# Altium PCB MachXO3D-QFN72-breakout.PcbDoc
Units mm, origin at the board's own origin, x right, y up, seen from the top; angles counter-clockwise.
Board outline 38 x 32 mm, 4 copper layers (Top Layer, L2, L3, Bottom Layer), stack 1.588 mm thick; 90 components, 61 nets, 201 pads, 144 vias.
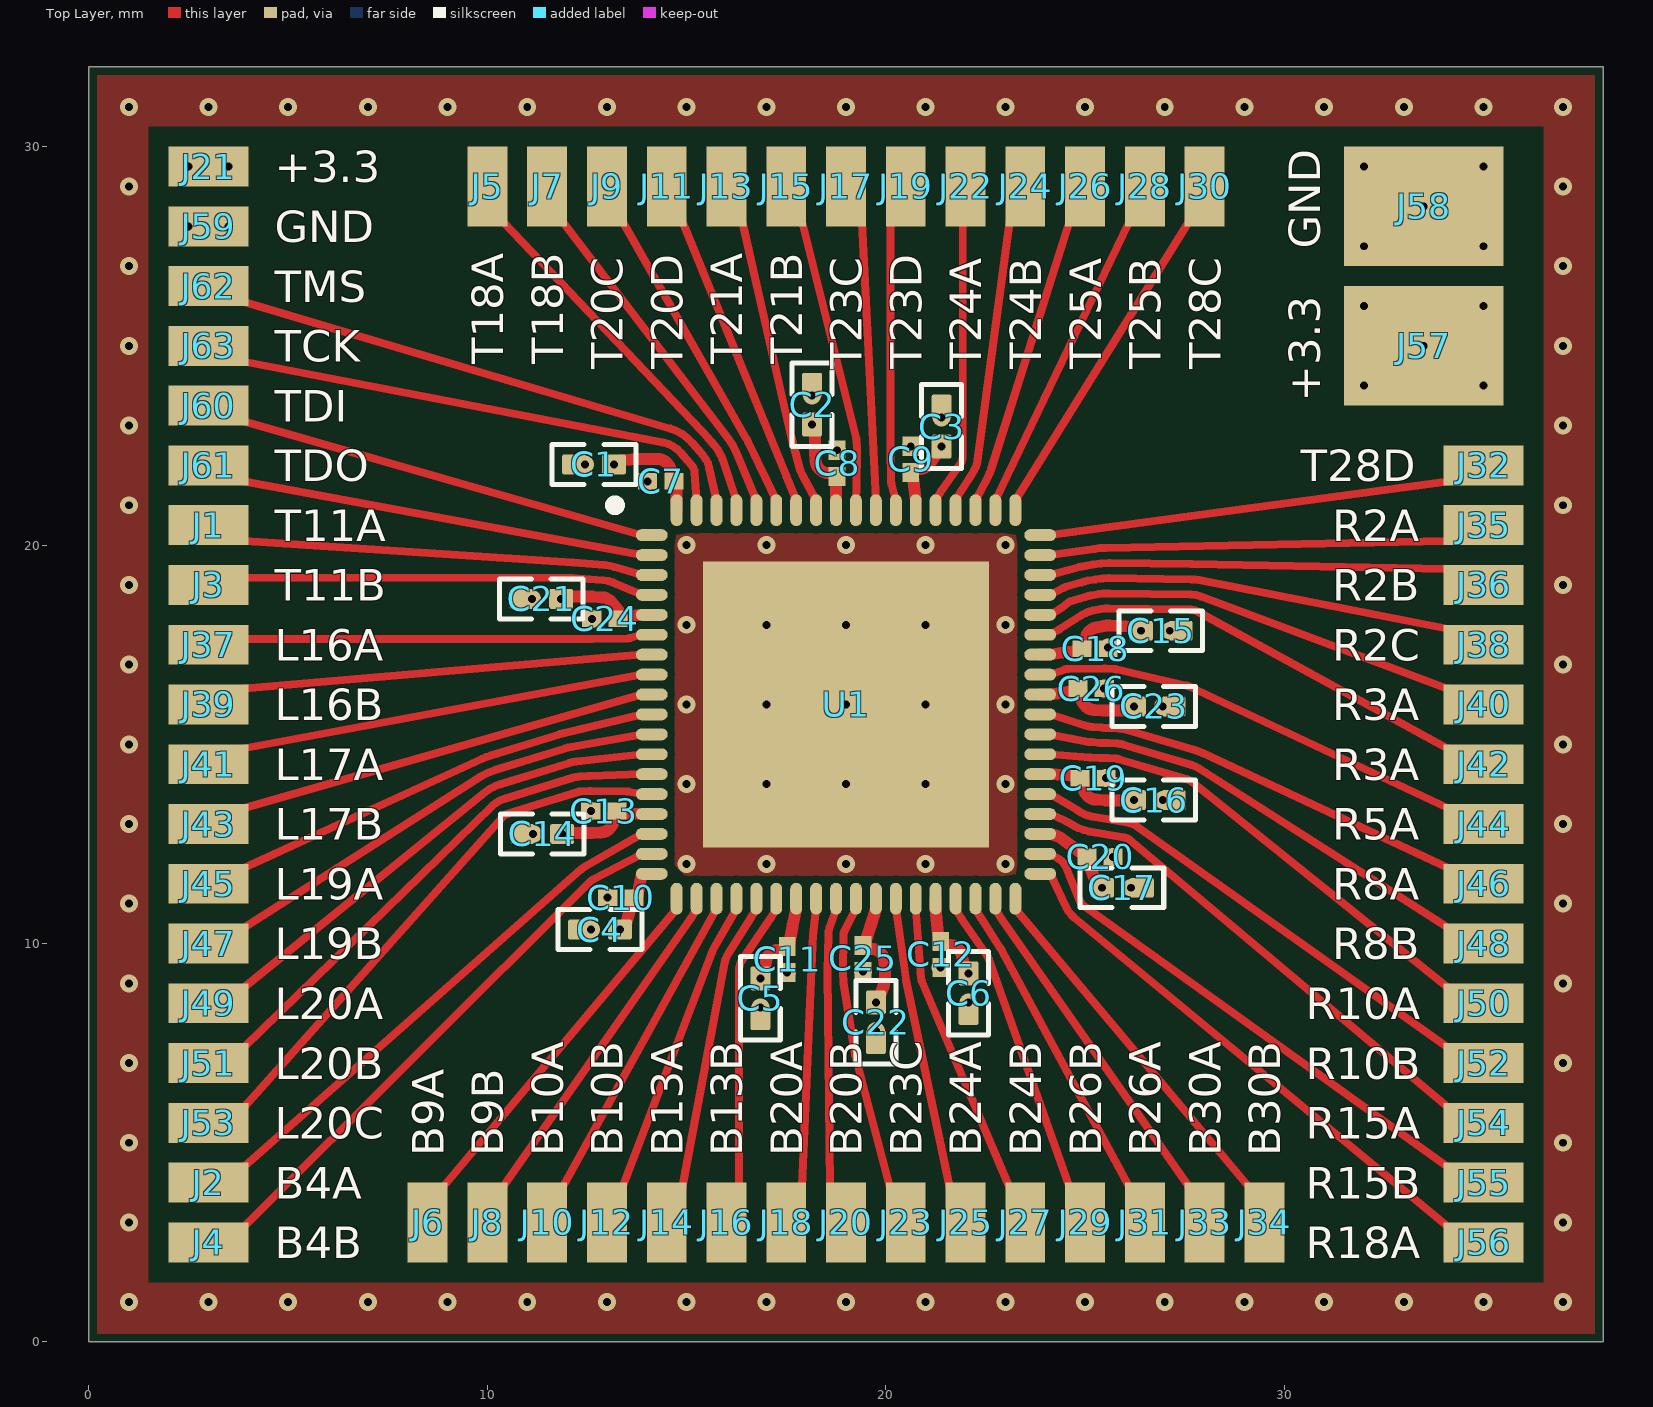
[diagram p0: Top Layer view]
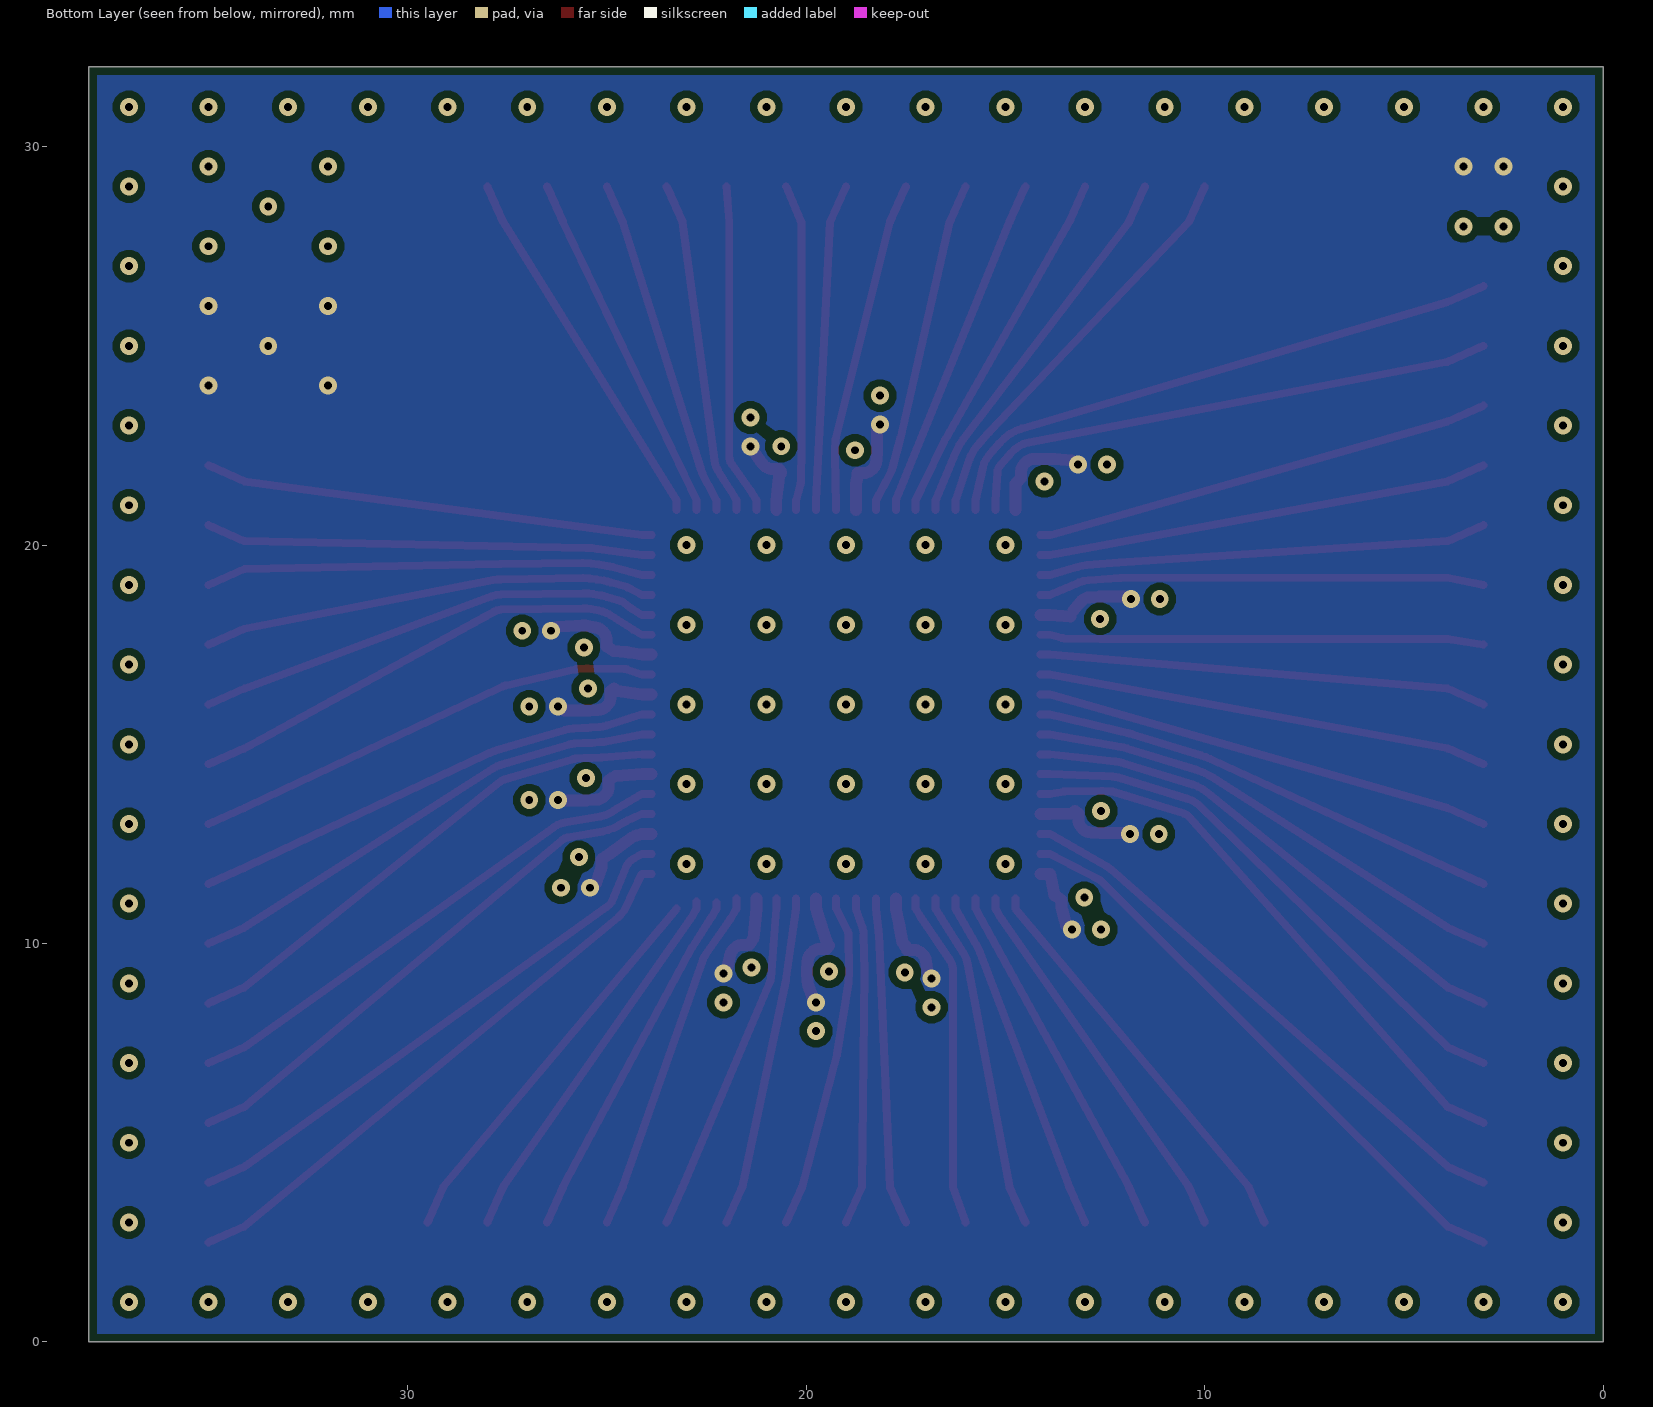
[diagram p1: Bottom Layer view, seen from below]
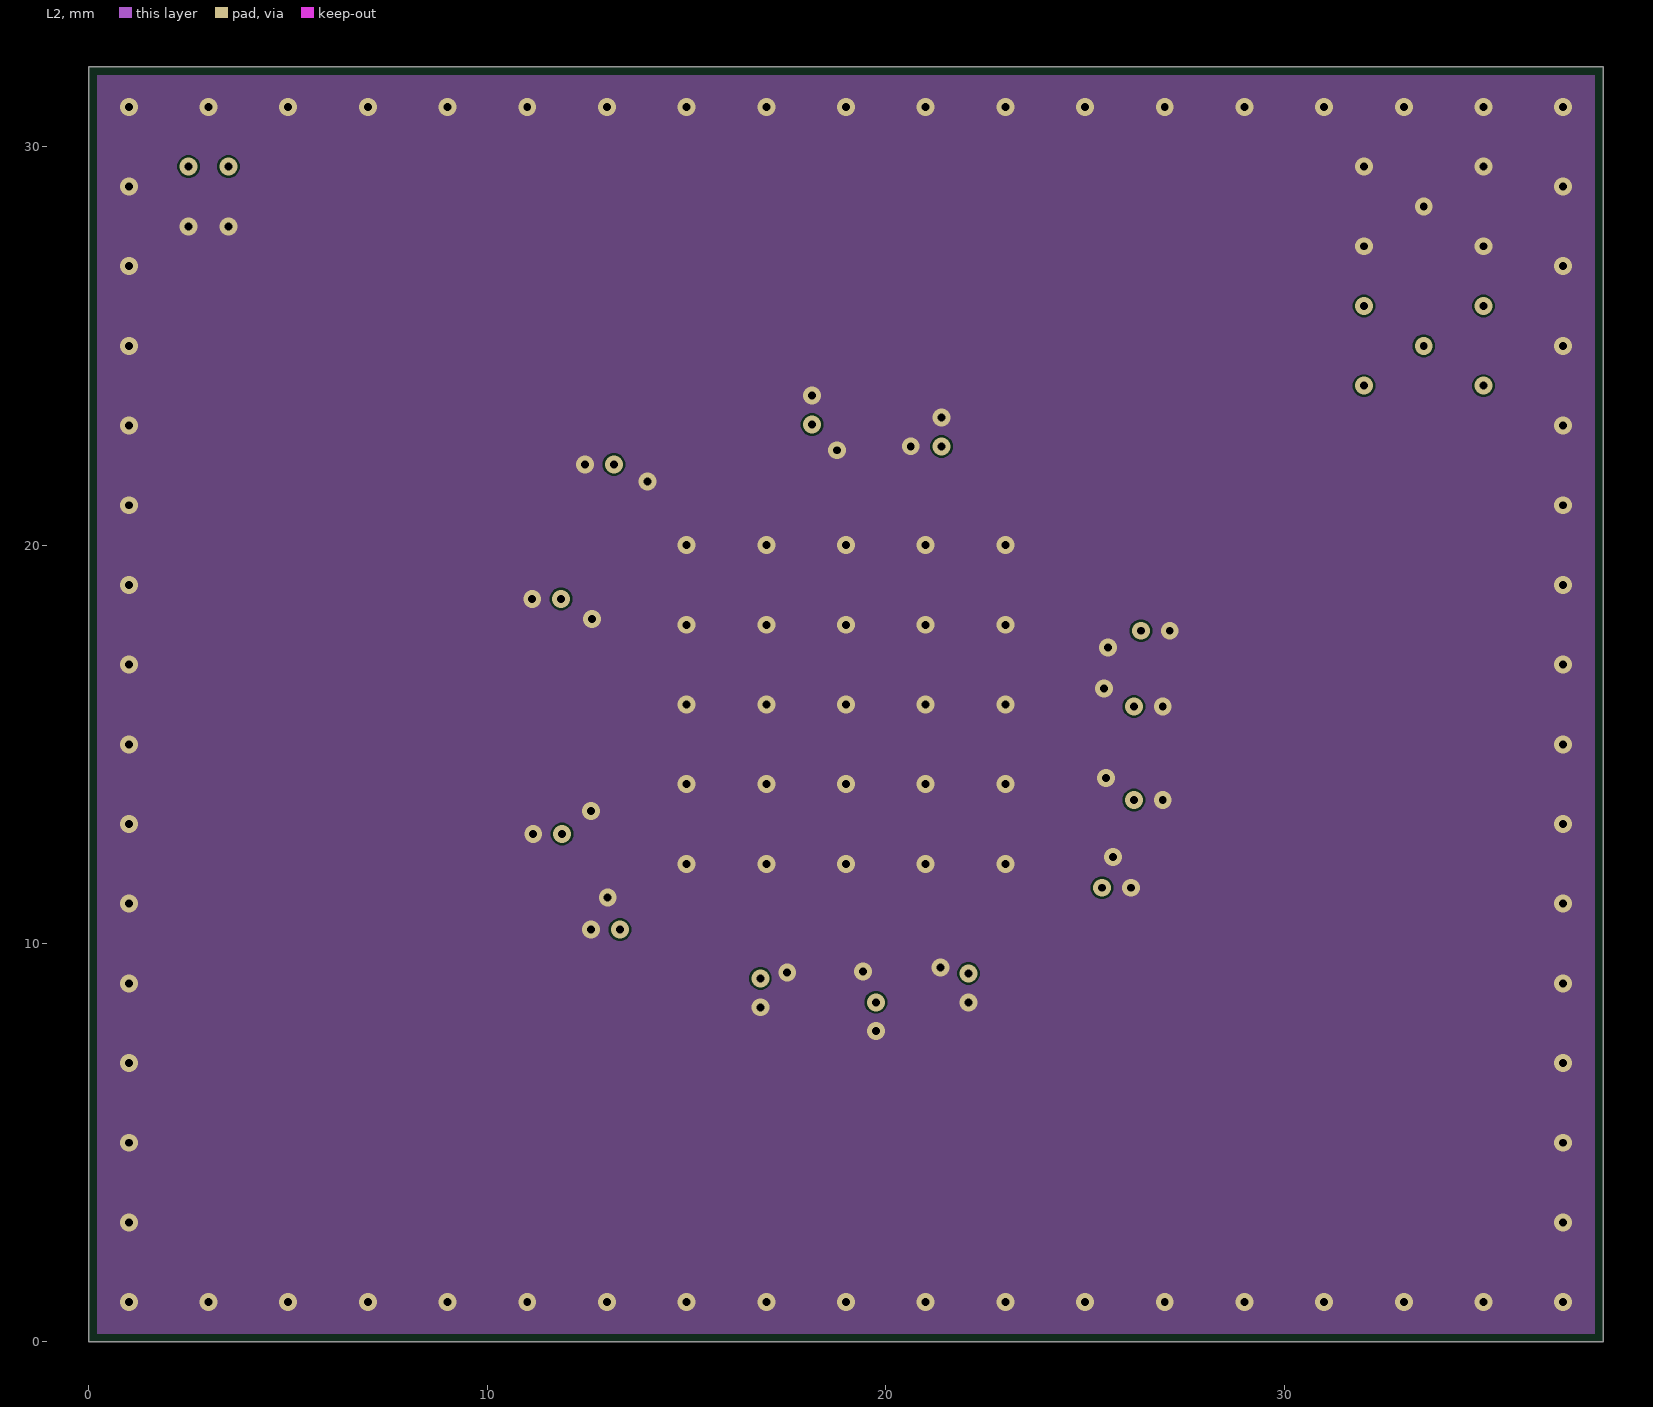
[diagram p2: L2]
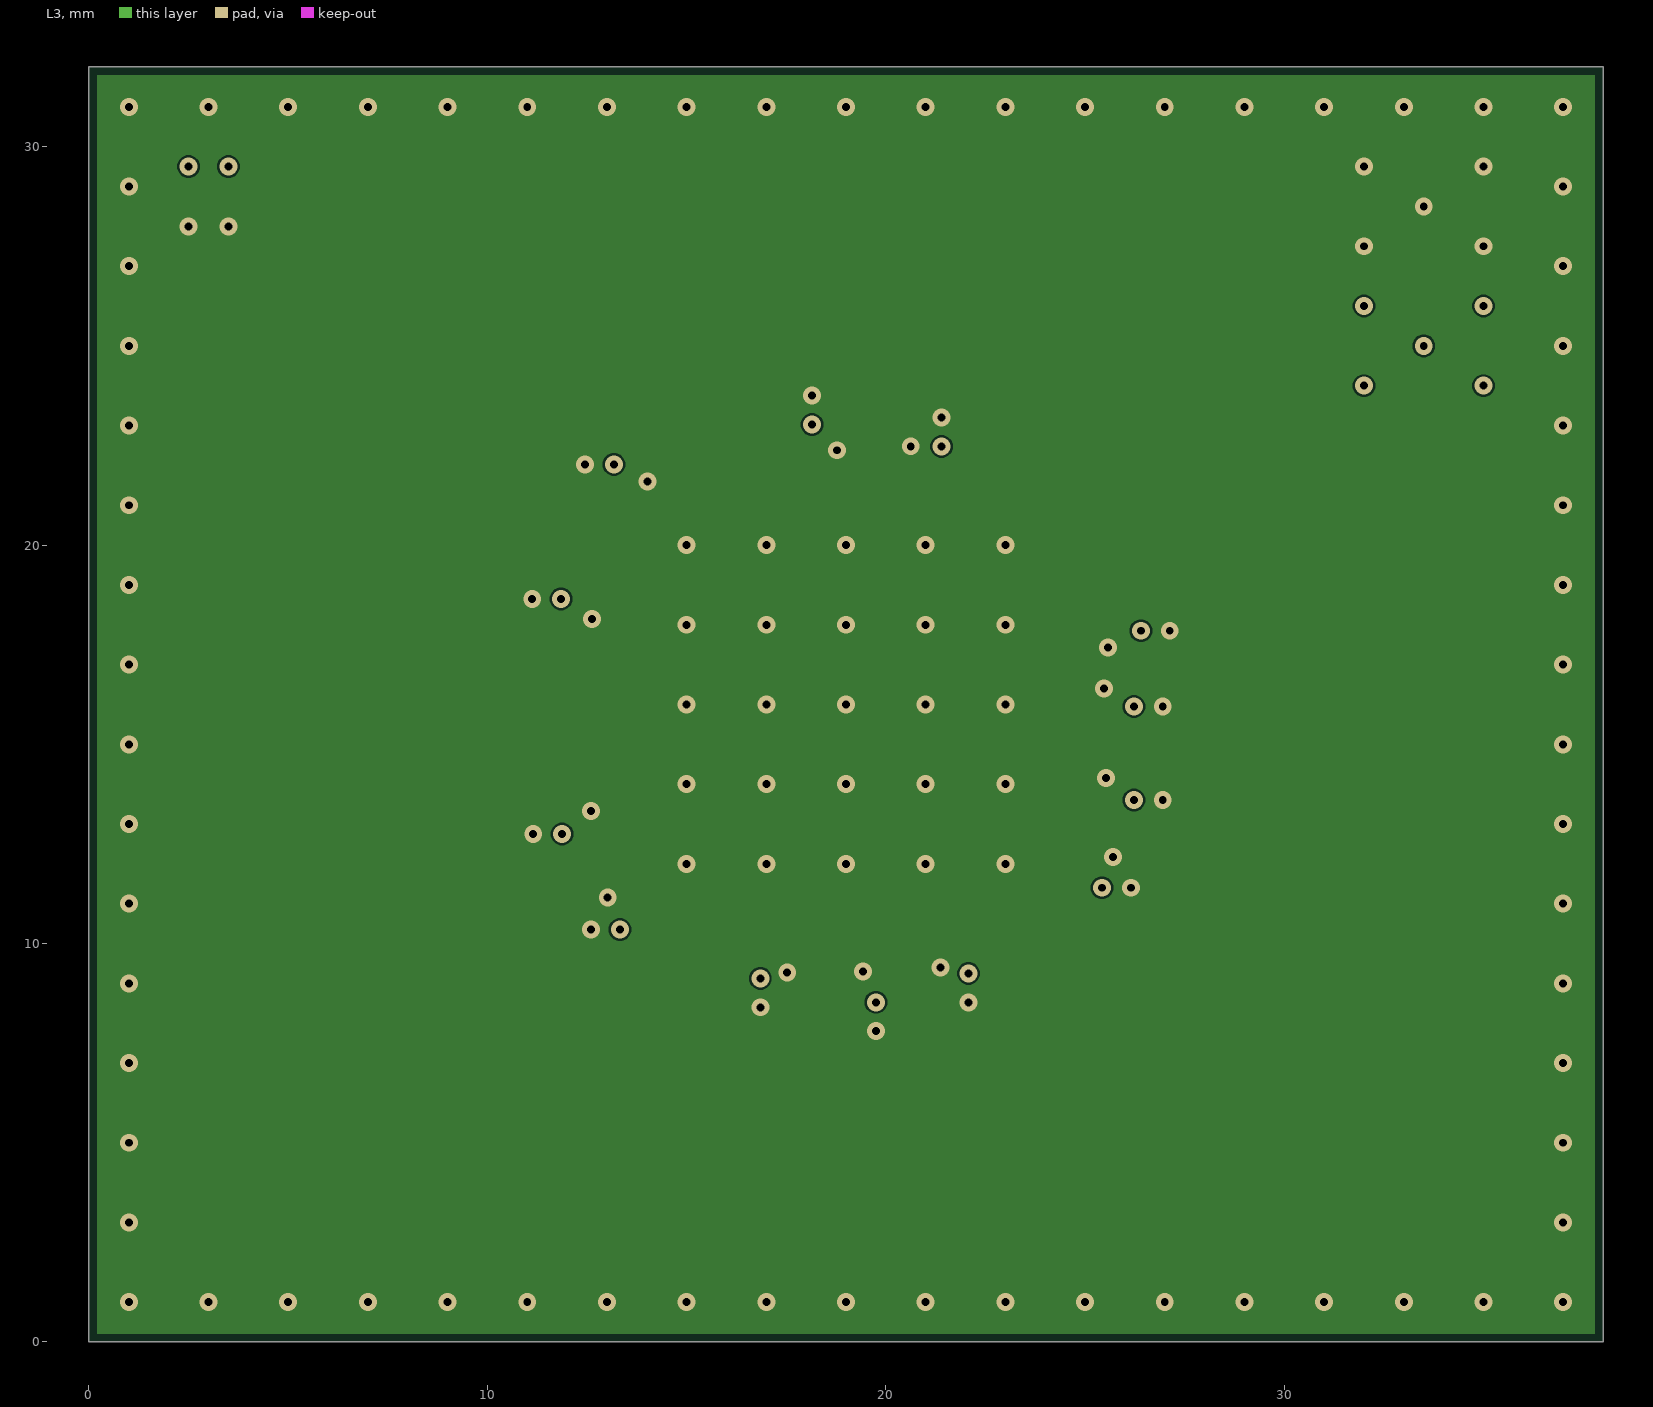
[diagram p3: L3]
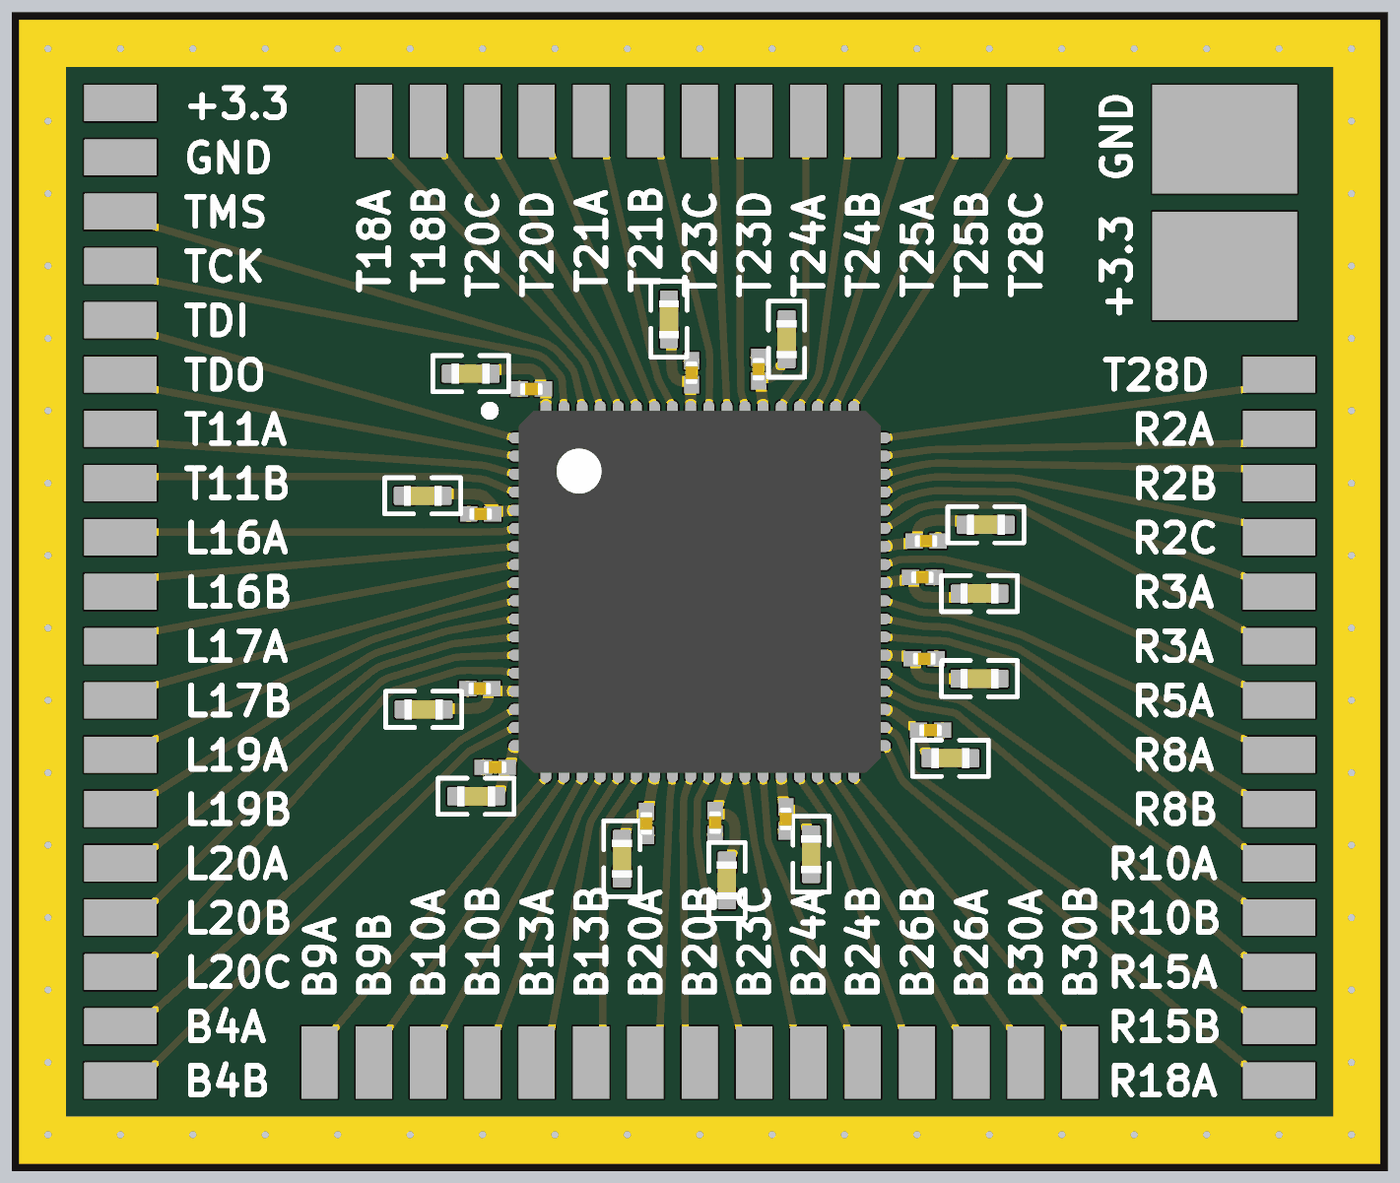
[diagram p4: 3D render of the assembled board from above, using the file's embedded part models]

## Layer stack, top to bottom
Top Solder: solder mask 0.0102, Solder Resist, Dk 3.5
Top Layer: signal copper 0.035
Dielectric 2: prepreg 0.2083, PP-022, Dk 4.5
L2: signal copper 0.018
Dielectric 1: core 1.065, Core-042, Dk 4.6
L3: signal copper 0.018
Dielectric 3: prepreg 0.2083, PP-022, Dk 4.5
Bottom Layer: signal copper 0.035
Bottom Solder: solder mask 0.0102, Solder Resist, Dk 3.5

## Board outline
0,0 38,0 38,32 0,32

## Design rules (kind name [scope] priority, off if disabled: settings)
BoardOutlineClearance [All] p1: gap=0.2 ignorepadtopadclearanceinfootprint=FALSE except(0: Arc-SplitContinuation Track-SplitContinuation SMDPad-SplitContinuation THPad-SplitContinuation Via-SplitContinuation Fill-SplitContinuation Poly-SplitContinuation Region-SplitContinuation Text-SplitContinuation)
Clearance [All] p1: gap=0.18 ignorepadtopadclearanceinfootprint=TRUE except(0: Arc-Hole Track-Hole SMDPad-Hole THPad-Hole Via-Hole Fill-Hole Poly-Hole Region-Hole Text-Hole)
ComponentClearance [All] p1: gap=0.2 collisioncheckmode=3 verticalgap=0.2 showdistances=FALSE
HoleSize [All] p1: absolutevalues=TRUE maxlimit=3 minlimit=0.2 maxpercent=80.000 minpercent=20.000
HoleToHoleClearance [All] p1: gap=0.2 allowstackedmicrovias=TRUE
MinimumSolderMaskSliver [All] p1: minsoldermaskwidth=0.2
PlaneClearance [All] p1: clearance=0.5
PolygonConnect PolygonConnectVia [IsVia] p1: connectstyle=Direct reliefconductorwidth=0.2 reliefentries=4 polygonreliefangle="90 Angle" airgapwidth=0.2
PolygonConnect [All] p2: connectstyle=Direct reliefconductorwidth=0.2 reliefentries=4 polygonreliefangle="90 Angle" airgapwidth=0.2
RoomDefinition MachXO3D-QFN72-breakout [InComponentClass('MachXO3D-QFN72-breakout')] p1: confinementstyle=ConfineIn formatcopy=TRUE lockcomponents=FALSE outline -50,-39 101,-39 101,110 -50,110
RoutingVias [All] p1: holewidth=0.2 width=0.45 viastyle="Through Hole" minholewidth=0.2 minwidth=0.45 maxholewidth=3 maxwidth=5
SilkToSilkClearance [All] p1: silktosilkclearance=0.2
SilkToSolderMaskClearance [IsPad] p1: minsilkscreentomaskgap=0.2 clearancetoexposedcopper=TRUE
SolderMaskExpansion SolderMaskExpansionVia [IsVia] p1: expansion=0.05 istentingtop=TRUE
SolderMaskExpansion [All] p2: expansion=0.05 istentingtop=FALSE
Width [All] p1: maxlimit=5 minlimit=0.2 preferedwidth=0.2
23 further rules are at their usual default settings.

## Components (designator, comment, footprint, x,y, rotation, side; value= is the part's Value field where it differs from the comment)
C1 "10u" CAPC1005X55N 12.675,22.025 r180 top
C2 "10u" CAPC1005X55N 18.15,23.525 r90 top
C3 "10u" CAPC1005X55N 21.4,22.975 r90 top
C4 "10u" CAPC1005X55N 12.825,10.35 r180 top
C5 "10u" CAPC1005X55N 16.85,8.625 r270 top
C6 "10u" CAPC1005X55N 22.075,8.75 r270 top
C7 "CAPC_100n_0201" CAPC0603X04N 14.35,21.6 r0 top value=100n
C8 "CAPC_100n_0201" CAPC0603X04N 18.775,22.05 r270 top value=100n
C9 "CAPC_100n_0201" CAPC0603X04N 20.625,22.15 r270 top value=100n
C10 "CAPC_100n_0201" CAPC0603X04N 13.35,11.15 r0 top value=100n
C11 "CAPC_100n_0201" CAPC0603X04N 17.525,9.6 r90 top value=100n
C12 "CAPC_100n_0201" CAPC0603X04N 21.375,9.725 r90 top value=100n
C13 "CAPC_100n_0201" CAPC0603X04N 12.925,13.325 r0 top value=100n
C14 "10u" CAPC1005X55N 11.375,12.75 r180 top
C15 "10u" CAPC1005X55N 26.9,17.85 r0 top
C16 "10u" CAPC1005X55N 26.725,13.6 r0 top
C17 "10u" CAPC1005X55N 25.925,11.4 r0 top
C18 "CAPC_100n_0201" CAPC0603X04N 25.25,17.4 r180 top value=100n
C19 "CAPC_100n_0201" CAPC0603X04N 25.2,14.15 r180 top value=100n
C20 "CAPC_100n_0201" CAPC0603X04N 25.375,12.175 r180 top value=100n
C21 "10u" CAPC1005X55N 11.35,18.65 r180 top
C22 "10u" CAPC1005X55N 19.75,8.025 r270 top
C23 "10u" CAPC1005X55N 26.725,15.95 r0 top
C24 "CAPC_100n_0201" CAPC0603X04N 12.95,18.15 r0 top value=100n
C25 "CAPC_100n_0201" CAPC0603X04N 19.425,9.625 r90 top value=100n
C26 "CAPC_100n_0201" CAPC0603X04N 25.15,16.4 r180 top value=100n
J1 "T11A" PAD-1020 3,20.5 r90 top
J2 "B4A" PAD-1020 3,4 r90 top
J3 "T11B" PAD-1020 3,19 r90 top
J4 "B4B" PAD-1020 3,2.5 r90 top
J5 "T18A" PAD-1020 10,29 r0 top
J6 "B9A" PAD-1020 8.5,3 r0 top
J7 "T18B" PAD-1020 11.5,29 r0 top
J8 "B9B" PAD-1020 10,3 r0 top
J9 "T20C" PAD-1020 13,29 r0 top
J10 "B10A" PAD-1020 11.5,3 r0 top
J11 "T20D" PAD-1020 14.5,29 r0 top
J12 "B10B" PAD-1020 13,3 r0 top
J13 "T21A" PAD-1020 16,29 r0 top
J14 "B13A" PAD-1020 14.5,3 r0 top
J15 "T21B" PAD-1020 17.5,29 r0 top
J16 "B13B" PAD-1020 16,3 r0 top
J17 "T23C" PAD-1020 19,29 r0 top
J18 "B20A" PAD-1020 17.5,3 r0 top
J19 "T23D" PAD-1020 20.5,29 r0 top
J20 "B20B" PAD-1020 19,3 r0 top
J21 "+3.3" PAD-1020 3,29.5 r270 top
J22 "T24A" PAD-1020 22,29 r0 top
J23 "B23C" PAD-1020 20.5,3 r0 top
J24 "T24B" PAD-1020 23.5,29 r0 top
J25 "B24A" PAD-1020 22,3 r0 top
J26 "T25A" PAD-1020 25,29 r180 top
J27 "B24B" PAD-1020 23.5,3 r0 top
J28 "T25B" PAD-1020 26.5,29 r180 top
J29 "B26A" PAD-1020 25,3 r0 top
J30 "T28C" PAD-1020 28,29 r0 top
J31 "B26B" PAD-1020 26.5,3 r0 top
J32 "T28D" PAD-1020 35,22 r270 top
J33 "B30A" PAD-1020 28,3 r0 top
J34 "B30B" PAD-1020 29.5,3 r0 top
J35 "R2A" PAD-1020 35,20.5 r90 top
J36 "R2B" PAD-1020 35,19 r90 top
J37 "L16A" PAD-1020 3,17.5 r90 top
J38 "R2C" PAD-1020 35,17.5 r90 top
J39 "L16B" PAD-1020 3,16 r90 top
J40 "R3A" PAD-1020 35,16 r90 top
J41 "L17A" PAD-1020 3,14.5 r90 top
J42 "R3A" PAD-1020 35,14.5 r90 top
J43 "L17B" PAD-1020 3,13 r90 top
J44 "R5A" PAD-1020 35,13 r90 top
J45 "L19A" PAD-1020 3,11.5 r90 top
J46 "R8A" PAD-1020 35,11.5 r90 top
J47 "L19B" PAD-1020 3,10 r90 top
J48 "R8B" PAD-1020 35,10 r90 top
J49 "L20A" PAD-1020 3,8.5 r90 top
J50 "R10A" PAD-1020 35,8.5 r90 top
J51 "L20B" PAD-1020 3,7 r90 top
J52 "R10B" PAD-1020 35,7 r90 top
J53 "L20C" PAD-1020 3,5.5 r90 top
J54 "R15A" PAD-1020 35,5.5 r90 top
J55 "R15B" PAD-1020 35,4 r90 top
J56 "R18A" PAD-1020 35,2.5 r90 top
J57 "+3.3" POWER-PAD-4x3 33.5,25 r0 top
J58 "GND" POWER-PAD-4x3 33.5,28.5 r0 top
J59 "GND" PAD-1020 3,28 r90 top
J60 "TDI" PAD-1020 3,23.5 r90 top
J61 "TDO" PAD-1020 3,22 r90 top
J62 "TMS" PAD-1020 3,26.5 r90 top
J63 "TCK" PAD-1020 3,25 r90 top
U1 "LCMXO3D-QFN72" MachXO3D-QFN72 19,16 r0 top locked

## Footprints (in the part's own frame and the unit in brackets; to place one, negate y for a bottom-side part, rotate by r counter-clockwise, add the part's x,y. Pads: shape width x height; smd on the part's side, far side on the other; paste and mask are expansions set on the pad)
CAPC0603X04N [mm] "Chip Capacitor, 2-Leads, Body 0,60x0,30mm, IPC Medium Density"
  rect 0.48x0.42 smd: 1(-0.33,0) 2(0.33,0)
  body extent -0.33,-0.18 0.33,0.18, height 0.35
CAPC1005X55N [mm] "Chip Capacitor, Body 1.0x0.5mm, EIA 0402, IPC Medium Density"
  round 0.2 on Mech15: 0(0,0)
  rrect20% 0.6x0.5 smd: 1(-0.5,0) 2(0.5,0)
  Top Layer pour cut-out: -0.325,0.375 -0.2,0.5 0.2,0.5 0.325,0.375 0.325,-0.375 0.2,-0.5 -0.2,-0.5 -0.325,-0.375
  silkscreen extent -1.05,-0.5 1.05,0.5, body extent -0.52,-0.27 0.53,0.28, height 0.55
MachXO3D-QFN72 [mm] "QFN, 72-Leads, Body 10,00x10,00mm, Pitch 0,50mm, Thermal Pad 7,18x7,18mm, IPC Medium Density"
  oval 0.8x0.3 smd: 1(-4.875,4.25) 2(-4.875,3.75) 3(-4.875,3.25) 4(-4.875,2.75) 5(-4.875,2.25) 6(-4.875,1.75) 7(-4.875,1.25) 8(-4.875,0.75) 9(-4.875,0.25) 10(-4.875,-0.25) 11(-4.875,-0.75) 12(-4.875,-1.25) 13(-4.875,-1.75) 14(-4.875,-2.25) 15(-4.875,-2.75) 16(-4.875,-3.25) 17(-4.875,-3.75) 18(-4.875,-4.25) 37(4.875,-4.25) 38(4.875,-3.75) 39(4.875,-3.25) 40(4.875,-2.75) 41(4.875,-2.25) 42(4.875,-1.75) 43(4.875,-1.25) 44(4.875,-0.75) 45(4.875,-0.25) 46(4.875,0.25) 47(4.875,0.75) 48(4.875,1.25) 49(4.875,1.75) 50(4.875,2.25) 51(4.875,2.75) 52(4.875,3.25) 53(4.875,3.75) 54(4.875,4.25)
  oval 0.3x0.8 smd: 19(-4.25,-4.875) 20(-3.75,-4.875) 21(-3.25,-4.875) 22(-2.75,-4.875) 23(-2.25,-4.875) 24(-1.75,-4.875) 25(-1.25,-4.875) 26(-0.75,-4.875) 27(-0.25,-4.875) 28(0.25,-4.875) 29(0.75,-4.875) 30(1.25,-4.875) 31(1.75,-4.875) 32(2.25,-4.875) 33(2.75,-4.875) 34(3.25,-4.875) 35(3.75,-4.875) 36(4.25,-4.875) 55(4.25,4.875) 56(3.75,4.875) 57(3.25,4.875) 58(2.75,4.875) 59(2.25,4.875) 60(1.75,4.875) 61(1.25,4.875) 62(0.75,4.875) 63(0.25,4.875) 64(-0.25,4.875) 65(-0.75,4.875) 66(-1.25,4.875) 67(-1.75,4.875) 68(-2.25,4.875) 69(-2.75,4.875) 70(-3.25,4.875) 71(-3.75,4.875) 72(-4.25,4.875)
  rect 7.18x7.18 smd: 73(0,0)
  silkscreen extent -5.92,4.88 -5.67,5.12, body extent -5,-5 5,5, height 0.9
PAD-1020 [mm]
  rect 1x2 smd: 1(0,0)
POWER-PAD-4x3 [mm]
  rect 4x3 smd: 1(0,0)

## Part data
C1 C2 C3 C4 C5 C6 C14 C15 C16 C17 C21 C22 C23: library part CAPC_1u_0402_X5R_6V3_10%, "Capacitor SMD Cer 1uF 10% 16V X5R 0402", Manufacturer 1="AVX Corporation", Manufacturer 2=Yageo, Manufacturer 3="Samsung Electro-Mechanics America, Inc", Manufacturer 4="TDK Corporation", Manufacturer 5="Murata Electronics North America", Manufacturer Part Number 1=04026D105KAT2A, Manufacturer Part Number 2=CC0402KRX5R5BB105, Manufacturer Part Number 3=CL05A105KQ5NNNC, Manufacturer Part Number 4=C1005X5R0J105K050BB, Manufacturer Part Number 5=GRM155R60J105KE19D, Operating Temperature="-55°C ~ 125°C", Package / Case="0402 (1005 Metric)", Ratings="6.3V; X5R", Supplier Part Number 1=478-2583-1-ND, Tolerance=±10%, ComponentLink1Description=http://www.avx.com/docs/Catalogs/cx5r.pdf, ComponentLink1URL=http://www.avx.com/docs/Catalogs/cx5r.pdf, ComponentLink2Description=http://www.yageo.com/documents/recent/UPY-GPHC_X5R_4V-to-50V_12.pdf, ComponentLink2URL=http://www.yageo.com/documents/recent/UPY-GPHC_X5R_4V-to-50V_12.pdf, ComponentLink3Description=http://www.samsungsem.com/servlet/FileDownload?path=productsearch&sname=CL05A105KQ5NNNC.pdf&oname=CL05A105KQ5NNNC.pdf, ComponentLink3URL=http://www.samsungsem.com/servlet/FileDownload?path=productsearch&sname=CL05A105KQ5NNNC.pdf&oname=CL05A105KQ5NNNC.pdf, ComponentLink4Description=http://product.tdk.com/capacitor/mlcc/en/documents/mlcc_commercial_general_en.pdf, ComponentLink4URL=http://product.tdk.com/capacitor/mlcc/en/documents/mlcc_commercial_general_en.pdf, ComponentLink5Description=http://www.murata.com/products/catalog/pdf/c02e.pdf, ComponentLink5URL=http://www.murata.com/products/catalog/pdf/c02e.pdf, RoHS 1="RoHS Compliant", RoHS 2="RoHS Compliant", RoHS 3="RoHS Compliant", RoHS 4="RoHS Compliant", RoHS 5="RoHS Compliant", SCDType=spec, Size / Dimension="0.039\" L x 0.020\" W (1.00mm x 0.50mm)", Supplier 1=Digi-Key, Supplier 2=Digi-Key, Supplier 3=Digi-Key, Supplier 4=Digi-Key, Supplier 5=Digi-Key, Supplier Part Number 2=311-1438-1-ND, Supplier Part Number 3=1276-1010-1-ND, Supplier Part Number 4=445-4998-1-ND, Supplier Part Number 5=490-1320-1-ND
J1 J2 J3 J4 J5 J6 J7 J8 J9 J10 J11 J12 J13 J14 J15 J16 J17 J18 J19 J20 J21 J22 J23 J24 J25 J26 J27 J28 J29 J30 J31 J32 J33 J34 J35 J36 J37 J38 J39 J40 J41 J42 J43 J44 J45 J46 J47 J48 J49 J50 J51 J52 J53 J54 J55 J56 J59 J60 J61 J62 J63: library part SOLDER-PAD
J57 J58: library part HEADER-1

## Via types
v1: diameter 0.45, hole 0.2, Top Layer to Bottom Layer, tented both sides, 144 vias

## Nets (pads, with @x,y where several pads share a name; then routed paths per layer and width w, separated by ;. In a path a pad name is that pad's centre, name@x,y a point inside that pad or via, vN(x,y) a via of type N, cw(c..) or ccw(c..) an arc to the next point about the centre after c; other vN are vias at no path point)
+3.3: C1.1 C2.1 C3.1 C4.1 C5.1 C6.1 C7.2 C8.2 C9.2 C10.2 C11.2 C12.2 C13.2 C14.1 C15.1 C16.1 C17.1 C18.2 C19.2 C20.2 C21.1 C22.1 C23.1 C24.2 C25.2 C26.2 J21.1 J57.1 U1.5 U1.15 U1.18 U1.25 U1.29 U1.32 U1.39 U1.42 U1.46 U1.48 U1.60 U1.64 U1.72 | length 32.3
  Top Layer w0.3: v1(11.85,18.65) 12,18.705 12.62,18.705 cw(c12.62,18.15) 12.656,18.704 12.881,18.689 cw(c12.86,18.36) 13.114,18.571 C24.2@13.291,18.358 ; v1(11.875,12.75) 12.025,12.77 12.595,12.77 ccw(c12.595,13.325) 12.63,12.771 12.856,12.786 ccw(c12.835,13.115) 13.165,13.115 13.165,13.265 C13.2 13.345,13.265 13.875,13.25 U1.15 ; v1(13.175,22.025) 13.325,22.125 13.752,22.159 cw(c13.78,21.81) 13.78,22.16 14.26,22.16 cw(c14.26,21.81) 14.61,21.81 C7.2@14.61,21.681 ; v1(13.325,10.35) 13.475,10.45 13.58,10.858 ccw(c13.26,10.94) 13.59,10.94 13.59,11.09 C10.2 13.77,11.21 13.875,11.75 U1.18 ; C24.2@13.37,18.21 13.875,18.25 U1.5 ; C7.2 14.75,21.54 U1.72 ; v1(16.85,9.125) 16.95,9.275 16.988,9.554 cw(c17.315,9.51) 17.315,9.84 17.465,9.84 C11.2 ; C11.2@17.506,9.952 17.585,10.02 17.655,10.427 cw(c18.67,10.252) 17.663,10.467 17.75,10.875 U1.25 ; v1(18.15,23.025) 18.22,22.875 18.22,22.38 ccw(c18.775,22.38) 18.221,22.345 18.236,22.119 ccw(c18.565,22.14) 18.565,21.81 18.715,21.81 C8.2@18.726,21.63 ; C8.2@18.727,21.629 cw(c18.447,21.521) 18.747,21.524 18.75,21.125 U1.64 ; C25.2 19.485,9.865 19.635,9.865 cw(c19.635,9.535) 19.964,9.556 19.979,9.331 cw(c19.425,9.295) 19.979,9.258 19.964,9.034 cw(c19.635,9.055) 19.946,8.944 19.85,8.675 v1(19.75,8.525) ; C25.2@19.485,10.045 19.491,10.062 ccw(c19.208,10.163) 19.494,10.07 19.707,10.727 ccw(c19.25,10.875) 19.711,10.741 19.75,10.875 U1.29 ; U1.60 20.75,21.125 20.697,21.597 cw(c20.995,21.631) 20.696,21.603 20.685,21.73 C9.2 20.685,21.91 20.835,21.91 ccw(c20.835,22.24) 21.104,22.049 21.3,22.325 v1(21.4,22.475) ; U1.32 21.25,10.875 21.306,10.238 21.315,10.145 C12.2 21.435,9.965 21.585,9.965 cw(c21.585,9.635) 21.907,9.706 21.975,9.4 v1(22.075,9.25) ; U1.39 24.125,12.75 24.259,12.711 cw(c24.125,12.25) 24.41,12.637 24.955,12.235 C20.2 25.135,12.115 25.135,11.965 ccw(c25.465,11.965) 25.153,11.859 25.275,11.5 v1(25.425,11.4) ; U1.42 24.125,14.25 24.78,14.21 C19.2 24.96,14.09 24.96,13.94 ccw(c25.29,13.94) 25.268,13.611 25.494,13.596 ccw(c25.53,14.15) 25.53,13.595 26.075,13.595 v1(26.225,13.6) ; U1.46 24.125,16.25 24.73,16.34 C26.2 24.91,16.34 24.91,16.19 ccw(c25.24,16.19) 25.219,15.861 25.444,15.846 ccw(c25.48,16.4) 25.484,15.845 26.075,15.85 v1(26.225,15.95) ; U1.48 24.125,17.25 24.455,17.309 cw(c24.58,16.61) 24.529,17.318 24.83,17.34 C18.2 25.01,17.46 25.01,17.61 cw(c25.34,17.61) 25.281,17.935 25.481,17.971 cw(c25.58,17.425) 25.607,17.979 26.25,17.95 v1(26.4,17.85)
  other v1: 32,24 35,24 33.5,25 32,26 35,26 2.5,29.5 3.5,29.5
GND: C1.2 C2.2 C3.2 C4.2 C5.2 C6.2 C7.1 C8.1 C9.1 C10.1 C11.1 C12.1 C13.1 C14.2 C15.2 C16.2 C17.2 C18.1 C19.1 C20.1 C21.2 C22.2 C23.2 C24.1 C25.1 C26.1 J58.1 J59.1 U1.73
  other v1: 1,1 3,1 5,1 7,1 9,1 11,1 13,1 15,1 17,1 19,1 21,1 23,1 25,1 27,1 29,1 31,1 33,1 35,1 37,1 1,3 37,3 1,5 37,5 1,7 37,7 19.75,7.8 16.85,8.4 22.075,8.525 1,9 37,9 17.525,9.27 19.425,9.295 21.375,9.395 12.6,10.35 1,11 37,11 13.02,11.15 26.15,11.4 15,12 17,12 19,12 21,12 23,12 25.705,12.175 11.15,12.75 1,13 37,13 12.595,13.325 26.95,13.598 15,14 17,14 19,14 21,14 23,14 25.53,14.15 1,15 37,15 26.95,15.95 15,16 17,16 19,16 21,16 23,16 25.48,16.4 1,17 37,17 25.58,17.425 27.125,17.85 15,18 17,18 19,18 21,18 23,18 12.62,18.15 11.125,18.65 1,19 37,19 15,20 17,20 19,20 21,20 23,20 1,21 37,21 14.02,21.6 12.45,22.025 18.775,22.38 20.625,22.48 1,23 37,23 21.4,23.2 18.15,23.75 1,25 37,25 1,27 37,27 32,27.5 35,27.5 2.5,28 3.5,28 33.5,28.5 1,29 37,29 32,29.5 35,29.5 1,31 3,31 5,31 7,31 9,31 11,31 13,31 15,31 17,31 19,31 21,31 23,31 25,31 27,31 29,31 31,31 33,31 35,31 37,31
PB4A: J2.1 U1.16 | length 14.3
  Top Layer w0.2: J2.1 3.9,4.4 12.343,11.855 cw(c12.78,11.36) 12.451,11.932 13.875,12.75 U1.16
PB4B: J4.1 U1.17 | length 15
  Top Layer w0.2: J4.1 3.9,2.9 12.582,11.558 cw(c12.78,11.36) 12.653,11.609 13.875,12.25 U1.17
PB9A: J6.1 U1.19 | length 10.3
  Top Layer w0.2: J6.1 8.9,3.9 14.75,10.875 U1.19
PB9B: J8.1 U1.20 | length 9.7
  Top Layer w0.2: J8.1 10.4,3.9 15.102,10.629 ccw(c14.75,10.875) 15.12,10.656 15.25,10.875 U1.20
PB10A: J10.1 U1.21 | length 9.2
  Top Layer w0.2: J10.1 11.9,3.9 15.75,10.875 U1.21
PB10B: J12.1 U1.22 | length 8.8
  Top Layer w0.2: J12.1 13.4,3.9 15.631,9.763 cw(c16.65,9.375) 15.703,9.914 16.25,10.875 U1.22
PB13A: J14.1 U1.23 | length 8.5
  Top Layer w0.2: J14.1 14.9,3.9 15.952,9.506 cw(c16.65,9.375) 16.05,9.755 16.613,10.645 ccw(c16.25,10.875) 16.62,10.656 16.75,10.875 U1.23
PB13B: J16.1 U1.24 | length 8.5
  Top Layer w0.2: J16.1 16.32,3.9 16.32,9.375 cw(c16.65,9.375) 16.377,9.56 17.106,10.633 ccw(c16.75,10.875) 17.12,10.656 17.25,10.875 U1.24
PB20A: J18.1 U1.26 | length 8.2
  Top Layer w0.2: J18.1 17.9,3.9 18.176,10.24 cw(c19.215,10.195) 18.183,10.32 18.25,10.875 U1.26
PB20B: J20.1 U1.27 | length 8.2
  Top Layer w0.2: U1.27 18.75,10.875 18.591,10.409 ccw(c19.215,10.195) 18.555,10.206 18.54,9.31 ccw(c19.425,9.295) 18.54,9.285 18.6,3.9 J20.1
PB23C: J23.1 U1.28 | length 8.4
  Top Layer w0.2: U1.28 19.25,10.875 18.967,10.325 ccw(c19.215,10.195) 18.935,10.2 18.92,9.303 ccw(c19.425,9.295) 18.921,9.263 18.936,9.037 ccw(c19.215,9.055) 18.939,9.011 19.224,7.223 ccw(c19.55,7.275) 19.231,7.191 20.1,3.9 J23.1
PB24A: J25.1 U1.30 | length 8.3
  Top Layer w0.2: U1.30 20.25,10.875 20.512,9.061 ccw(c21.165,9.155) 20.519,9.019 21.6,3.9 J25.1
PB24B: J27.1 U1.31 | length 8.7
  Top Layer w0.2: U1.31 20.75,10.875 20.886,9.133 ccw(c21.165,9.155) 20.907,9.045 23.1,3.9 J27.1
PB26A: J29.1 U1.33 | length 8.8
  Top Layer w0.2: U1.33 21.75,10.875 21.88,10.656 ccw(c22.25,10.875) 21.896,10.631 22.544,9.691 cw(c22.275,9.5) 22.586,9.61 24.6,3.9 J29.1
PB26B: J31.1 U1.34 | length 9.1
  Top Layer w0.2: U1.34@22.25,11.035 22.25,10.875 22.38,10.656 ccw(c22.75,10.875) 22.387,10.644 22.873,9.882 cw(c22.275,9.5) 22.9,9.837 26.1,3.9 J31.1
PB30A: J33.1 U1.35 | length 9.7
  Top Layer w0.2: U1.35@22.75,11.054 22.75,10.875 22.88,10.656 ccw(c23.25,10.875) 22.898,10.629 27.6,3.9 J33.1
PB30B: J34.1 U1.36 | length 10.1
  Top Layer w0.2: U1.36@23.25,10.875 29.1,3.9 J34.1
PL16A: J37.1 U1.6 | length 11.1
  Top Layer w0.2: J37.1 3.9,17.645 12.621,17.645 ccw(c12.62,18.15) 12.628,17.645 13.525,17.66 ccw(c13.52,17.94) 13.597,17.671 13.875,17.75 U1.6
PL16B: J39.1 U1.7 | length 11.2
  Top Layer w0.2: J39.1 3.9,16.4 13.875,17.25 U1.7
PL17A: J41.1 U1.8 | length 11.4
  Top Layer w0.2: J41.1 3.9,14.9 13.875,16.75 U1.8
PL17B: J43.1 U1.9 | length 11.6
  Top Layer w0.2: J43.1 3.9,13.4 13.875,16.25 U1.9
PL19A: J45.1 U1.10 | length 12
  Top Layer w0.2: J45.1 3.9,11.9 9.854,14.631 cw(c10.625,12.95) 10.081,14.718 11.825,15.255 cw(c12.355,13.535) 11.936,15.285 13.875,15.75 U1.10
PL19B: J47.1 U1.11 | length 12.5
  Top Layer w0.2: J47.1 3.9,10.4 9.834,14.189 cw(c10.625,12.95) 10.192,14.355 11.935,14.892 cw(c12.355,13.535) 12.105,14.933 13.875,15.25 U1.11
PL20A: J49.1 U1.12 | length 13.1
  Top Layer w0.2: J49.1 3.9,8.9 9.938,13.797 cw(c10.625,12.95) 10.304,13.992 12.049,14.529 cw(c12.355,13.535) 12.24,14.569 13.875,14.75 U1.12
PL20B: J51.1 U1.13 | length 13.8
  Top Layer w0.2: J51.1 3.9,7.4 10.13,13.459 cw(c10.625,12.95) 10.416,13.629 12.159,14.165 cw(c12.355,13.535) 12.314,14.194 12.538,14.208 cw(c12.595,13.325) 12.568,14.21 13.875,14.25 U1.13
PL20C: J53.1 U1.14 | length 14.6
  Top Layer w0.2: J53.1 3.9,5.9 10.379,13.17 cw(c10.625,12.95) 10.528,13.265 12.273,13.803 cw(c12.355,13.535) 12.337,13.814 12.563,13.829 cw(c12.595,13.325) 12.603,13.83 13.5,13.815 cw(c13.495,13.535) 13.545,13.81 13.875,13.75 U1.14
PR2A: J35.1 U1.53 | length 11.2
  Top Layer w0.2: U1.53 24.125,19.75 25.231,19.906 cw(c25.58,17.425) 25.53,19.929 34.1,20.1 J35.1
PR2B: J36.1 U1.52 | length 11.2
  Top Layer w0.2: U1.52 24.125,19.25 24.845,19.444 cw(c25.34,17.61) 25,19.479 25.199,19.516 cw(c25.58,17.425) 25.612,19.55 27.671,19.52 cw(c27.65,18.05) 27.677,19.52 34.1,19.4 J36.1
PR2C: J38.1 U1.51 | length 11.4
  Top Layer w0.2: U1.51 24.125,18.75 24.443,18.921 cw(c24.623,18.586) 24.515,18.95 ; 24.515,18.95 24.906,19.067 cw(c25.34,17.61) 25.068,19.105 25.267,19.142 cw(c25.58,17.425) 25.605,19.17 27.666,19.14 cw(c27.65,18.05) 27.859,19.12 34.1,17.9 J38.1
PR3A: J40.1 U1.50 | length 11.8
  Top Layer w0.2: U1.50 24.125,18.25 24.344,18.38 ccw(c24.125,18.75) 24.383,18.406 24.623,18.586 25.015,18.703 cw(c25.34,17.61) 25.136,18.732 25.335,18.768 cw(c25.58,17.425) 25.6,18.79 27.66,18.76 cw(c27.65,18.05) 27.898,18.715 34.1,16.4 J40.1
PR3B: J42.1 U1.49 | length 12.3
  Top Layer w0.2: U1.49 24.125,17.75 24.344,17.88 ccw(c24.125,18.25) 24.355,17.886 24.934,18.252 cw(c25.34,17.61) 25.204,18.358 25.404,18.394 cw(c25.58,17.425) 25.594,18.41 27.655,18.38 cw(c27.65,18.05) 27.808,18.34 34.1,14.9 J42.1
PR5A: J44.1 U1.47 | length 12
  Top Layer w0.2: U1.47 24.125,16.75 24.489,16.875 cw(c24.58,16.61) 24.575,16.89 25.472,16.905 cw(c25.48,16.4) 25.514,16.904 25.738,16.889 cw(c25.72,16.61) 25.783,16.883 27.55,16.471 cw(c27.475,16.15) 27.615,16.449 34.1,13.4 J44.1
PR8A: J46.1 U1.45 | length 12
  Top Layer w0.2: U1.45 24.125,15.75 25.007,15.466 ccw(c25.24,16.19) 25.192,15.432 25.417,15.417 ccw(c25.48,16.4) 25.48,15.415 25.53,15.415 cw(c25.53,14.15) 25.611,15.412 25.837,15.398 cw(c25.77,14.36) 26.067,15.357 27.786,14.845 cw(c27.475,13.8) 27.939,14.786 34.1,11.9 J46.1
PR8B: J48.1 U1.44 | length 12.5
  Top Layer w0.2: U1.44 24.125,15.25 25.017,15.072 ccw(c25.24,16.19) 25.167,15.052 25.393,15.038 ccw(c25.48,16.4) 25.48,15.035 25.53,15.035 cw(c25.53,14.15) 25.587,15.033 25.812,15.019 cw(c25.77,14.36) 25.958,14.993 27.678,14.48 cw(c27.475,13.8) 27.858,14.398 34.1,10.4 J48.1
PR10A: J50.1 U1.43 | length 13.1
  Top Layer w0.2: U1.43 24.125,14.75 25.125,14.674 ccw(c25.24,16.19) 25.139,14.673 25.369,14.658 ccw(c25.48,16.4) 25.48,14.655 25.53,14.655 cw(c25.53,14.15) 25.562,14.654 25.788,14.639 cw(c25.77,14.36) 25.85,14.628 27.569,14.116 cw(c27.475,13.8) 27.682,14.057 34.1,8.9 J50.1
PR10B: J52.1 U1.41 | length 13.2
  Top Layer w0.2: U1.41 24.125,13.75 24.783,13.359 cw(c24.125,12.25) 24.802,13.348 24.892,13.293 ccw(c25.29,13.94) 25.166,13.19 26.056,13.036 cw(c25.945,12.385) 26.327,12.923 34.1,7.4 J52.1
PR15A: J54.1 U1.40 | length 13.8
  Top Layer w0.2: U1.40 24.125,13.25 24.502,13.078 cw(c24.125,12.25) 24.605,13.023 24.691,12.97 ccw(c25.29,13.94) 25.101,12.816 25.992,12.661 cw(c25.945,12.385) 26.125,12.599 34.1,5.9 J54.1
PR15B: J55.1 U1.38 | length 14.1
  Top Layer w0.2: U1.38 24.125,12.25 24.344,12.12 cw(c24.125,11.75) 24.522,11.914 24.87,11.074 ccw(c25.175,11.2) 24.983,10.932 34.1,4.4 J55.1
PR18A: J56.1 U1.37 | length 14.7
  Top Layer w0.2: U1.37 24.125,11.75 24.534,10.894 ccw(c25.175,11.2) 24.723,10.653 34.1,2.9 J56.1
PT11A: J1.1 U1.3 | length 11.3
  Top Layer w0.2: J1.1 3.9,20.1 12.147,19.558 cw(c12.1,18.85) 12.155,19.558 12.948,19.497 cw(c12.86,18.36) 13.181,19.454 13.875,19.25 U1.3
PT11B: J3.1 U1.4 | length 11.2
  Top Layer w0.2: J3.1 3.9,19.18 12.1,19.18 cw(c12.1,18.85) 12.125,19.179 12.919,19.118 cw(c12.86,18.36) 13.161,19.058 13.875,18.75 U1.4
PT18A: J5.1 U1.69 | length 10.4
  Top Layer w0.2: J5.1 10.4,28.1 15.376,22.872 cw(c14.26,21.81) 15.427,22.815 15.708,22.489 cw(c14.92,21.81) 15.905,22.144 16.25,21.125 U1.69
PT18B: J7.1 U1.68 | length 9.8
  Top Layer w0.2: J7.1 11.9,28.1 16.048,22.672 cw(c14.92,21.81) 16.228,22.362 16.75,21.125 U1.68
PT20C: J9.1 U1.67 | length 9.2
  Top Layer w0.2: J9.1 13.4,28.1 16.483,22.703 cw(c14.92,21.81) 16.541,22.593 17.25,21.125 U1.67
PT20D: J11.1 U1.66 | length 8.8
  Top Layer w0.2: J11.1 14.9,28.1 17.51,21.709 ccw(c18.565,22.14) 17.511,21.706 17.75,21.125 U1.66
PT21A: J13.1 U1.65 | length 8.5
  Top Layer w0.2: J13.1 16.4,28.1 17.629,22.701 ccw(c17.95,22.775) 17.631,22.69 17.831,21.944 ccw(c18.565,22.14) 17.897,21.778 18.25,21.125 U1.65
PT21B: J15.1 U1.63 | length 8.4
  Top Layer w0.2: J15.1 17.9,28.1 19.256,22.689 cw(c18.985,22.62) 19.264,22.638 19.279,22.412 cw(c18.775,22.38) 19.28,22.372 19.265,21.475 cw(c18.985,21.48) 19.265,21.468 19.25,21.125 U1.63
PT23C: J17.1 U1.62 | length 8.2
  Top Layer w0.2: J17.1 19.4,28.1 19.75,21.125 U1.62
PT23D: J19.1 U1.61 | length 8.2
  Top Layer w0.2: U1.61 20.25,21.125 20.145,21.506 cw(c20.415,21.58) 20.135,21.575 20.12,22.472 cw(c20.625,22.48) 20.12,22.48 20.12,28.1 J19.1
PT24A: J22.1 U1.59 | length 8.3
  Top Layer w0.2: U1.59 21.25,21.125 21.38,21.344 cw(c21.75,21.125) 21.4,21.374 21.869,22.034 ccw(c21.6,22.225) 21.93,22.225 21.93,23.725 21.93,28.1 J22.1
PT24B: J24.1 U1.58 | length 8.4
  Top Layer w0.2: U1.58 21.75,21.125 21.88,21.344 cw(c22.25,21.125) 21.891,21.361 22.083,21.654 ccw(c21.766,21.863) 22.091,21.665 22.207,21.856 ccw(c21.6,22.225) 22.304,22.131 23.1,28.1 J24.1
PT25A: J26.1 U1.57 | length 8.6
  Top Layer w0.2: U1.57 22.25,21.125 22.563,21.714 ccw(c21.6,22.225) 22.639,21.897 24.6,28.1 J26.1
PT25B: J28.1 U1.56 | length 9
  Top Layer w0.2: U1.56 22.75,21.125 26.1,28.1 J28.1
PT28C: J30.1 U1.55 | length 9.5
  Top Layer w0.2: U1.55 23.25,21.125 27.6,28.1 J30.1
PT28D: J32.1 U1.54 | length 11.3
  Top Layer w0.2: U1.54 24.125,20.25 34.1,21.6 J32.1
TCK: J63.1 U1.71 | length 13.8
  Top Layer w0.2: J63.1 3.9,24.6 14.408,22.576 cw(c14.26,21.81) 14.851,22.319 15.132,21.993 cw(c14.92,21.81) 15.199,21.83 15.25,21.125 U1.71
TDI: J60.1 U1.1 | length 11.6
  Top Layer w0.2: J60.1 3.9,23.1 13.875,20.25 U1.1
TDO: J61.1 U1.2 | length 11.4
  Top Layer w0.2: J61.1 3.9,21.6 13.875,19.75 U1.2
TMS: J62.1 U1.70 | length 14.7
  Top Layer w0.2: J62.1 3.9,26.1 14.591,22.922 cw(c14.26,21.81) 15.14,22.566 15.42,22.241 cw(c14.92,21.81) 15.565,21.951 15.75,21.125 U1.70
pads on no net: C1.0 C2.0 C3.0 C4.0 C5.0 C6.0 C14.0 C15.0 C16.0 C17.0 C21.0 C22.0 C23.0

## Polygon pours and split planes (outlines as drawn)
GND on L3 "GND_L03_P001" (solid, remove dead copper, pour order 1): 0,0 38,0 38,32 0,32
GND on L2 "GND_L02_P002" (solid, remove dead copper, pour order 2): 0,0 38,0 38,32 0,32
+3.3 on Bottom Layer "+3.3_L04_P000" (solid, remove dead copper, pour order 0): 0,0 0,32 38,32 38,0
GND on Top Layer "GND_L01_P004" (solid, remove dead copper, pour order 4): 0,32 38,32 38,0 0,0

## Other copper
Top Layer:
  pour cut-out: 1.5,30.5 36.5,30.5 36.5,1.5 23.3,11.7 23.3,20.3 14.7,20.3 14.7,11.7 23.3,11.7 36.5,1.5 1.5,1.5

## Silkscreen, mask and mechanical layers (free items; w line width, h text height)
Top Solder:
  rectangle: 36.5,1.5 38,30.5
  rectangle: 0,1.5 1.5,30.5
  rectangle: 0,30.5 38,32
  rectangle: 0,0 38,1.5
Bottom Solder:
  rectangle: 9.5,28 28.5,30
  rectangle: 2,2 4,27
  rectangle: 8,2 30,4
  rectangle: 34,2 36,22.5
Mechanical 1:
  the board outline again, w0.1